# Altium PCB MyPCB.PcbDoc
Units mil, origin at the board's own origin, x right, y up, seen from the top; angles counter-clockwise.
Board outline 3937.01 x 3937.01 mil, 4 copper layers (Top Layer, GND, POWER, Bottom Layer), stack 13.956 mil thick; 65 components, 101 nets, 468 pads, 156 vias.
Unrouted connection lines stored in the file: 10.
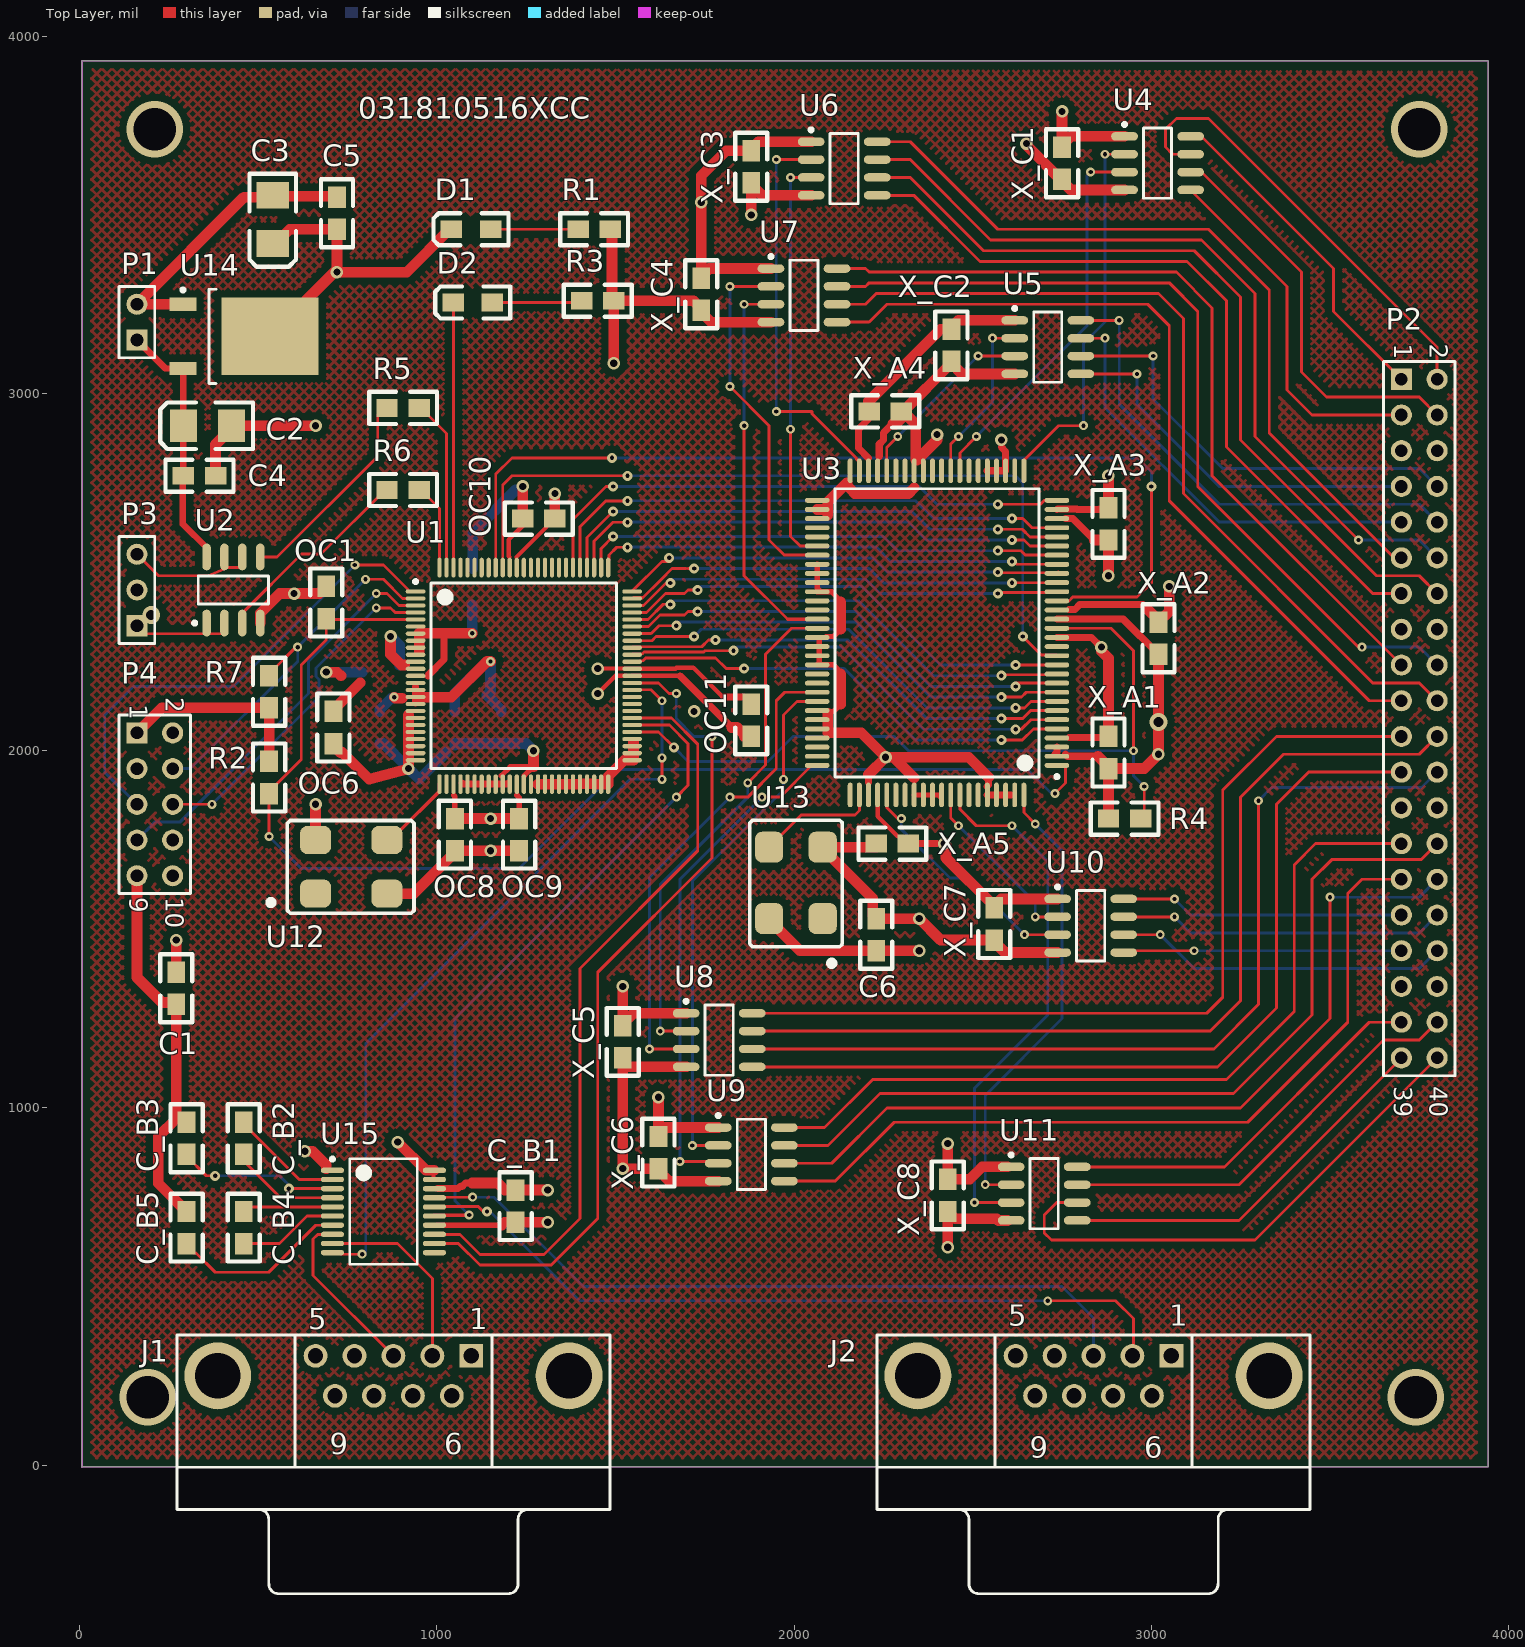
[diagram p0: Top Layer view]
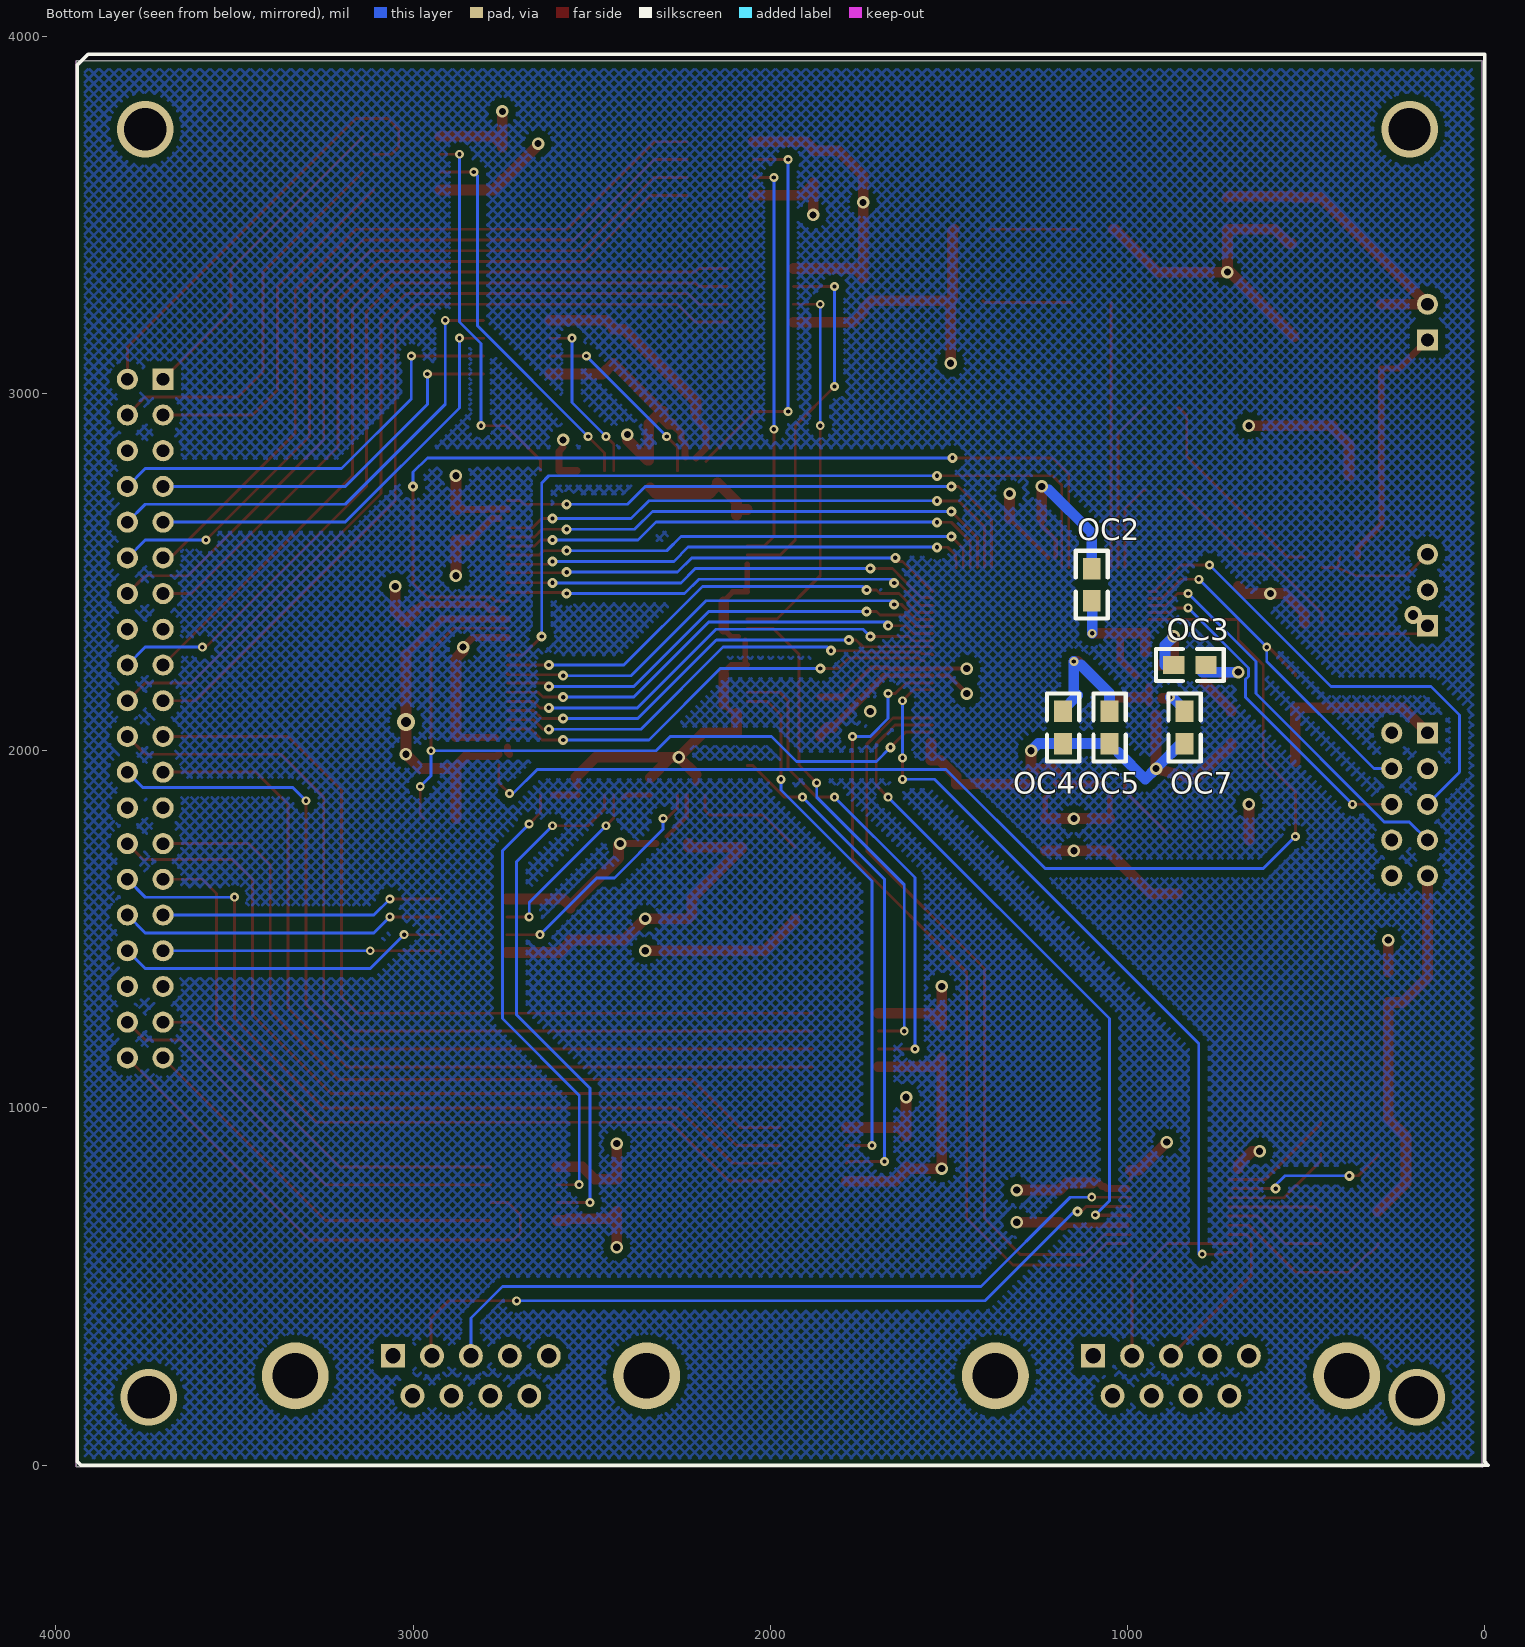
[diagram p1: Bottom Layer view, seen from below]
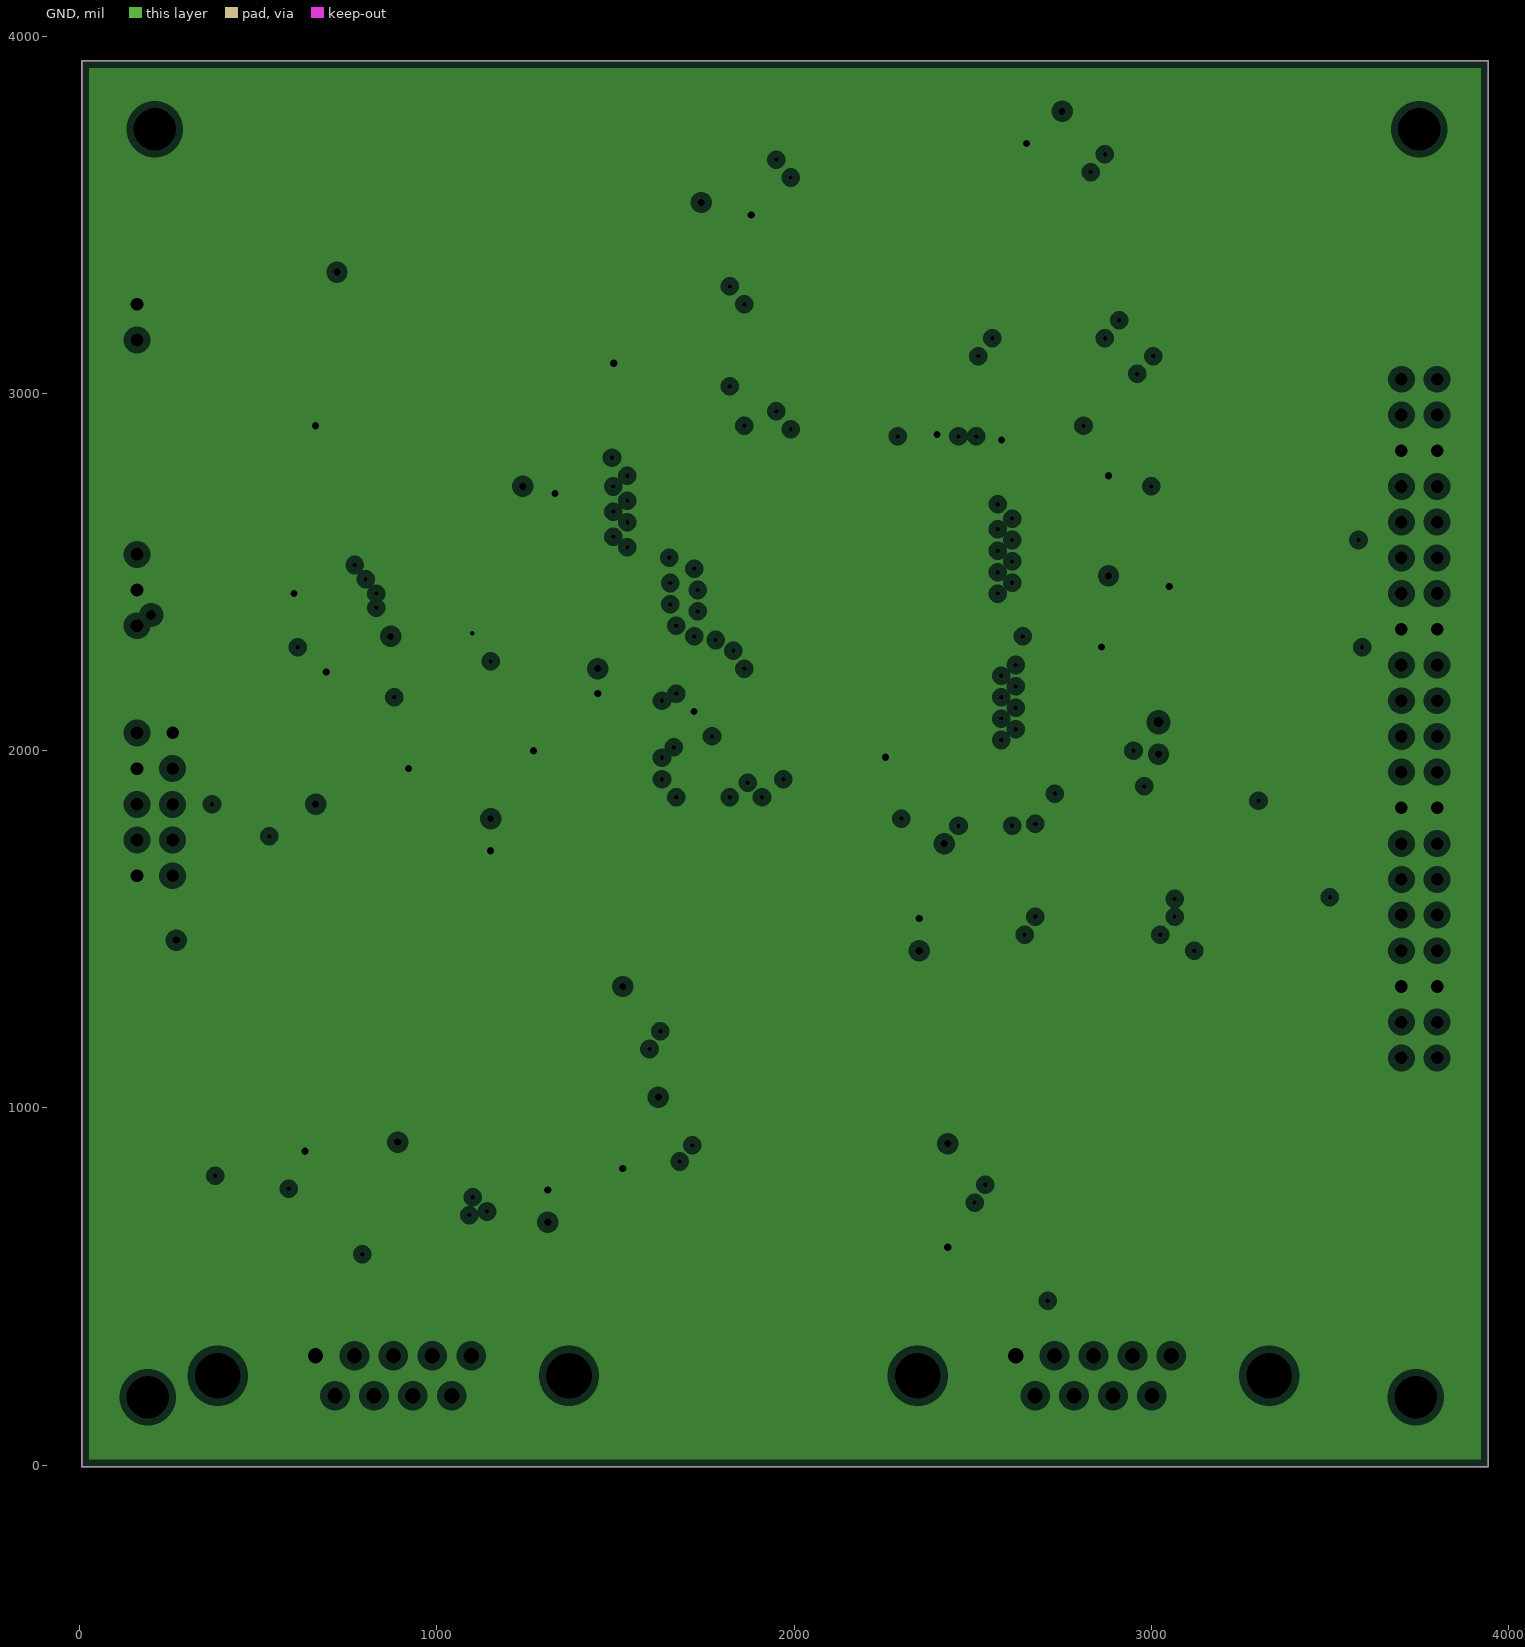
[diagram p2: GND, clearances drawn from the general rule]
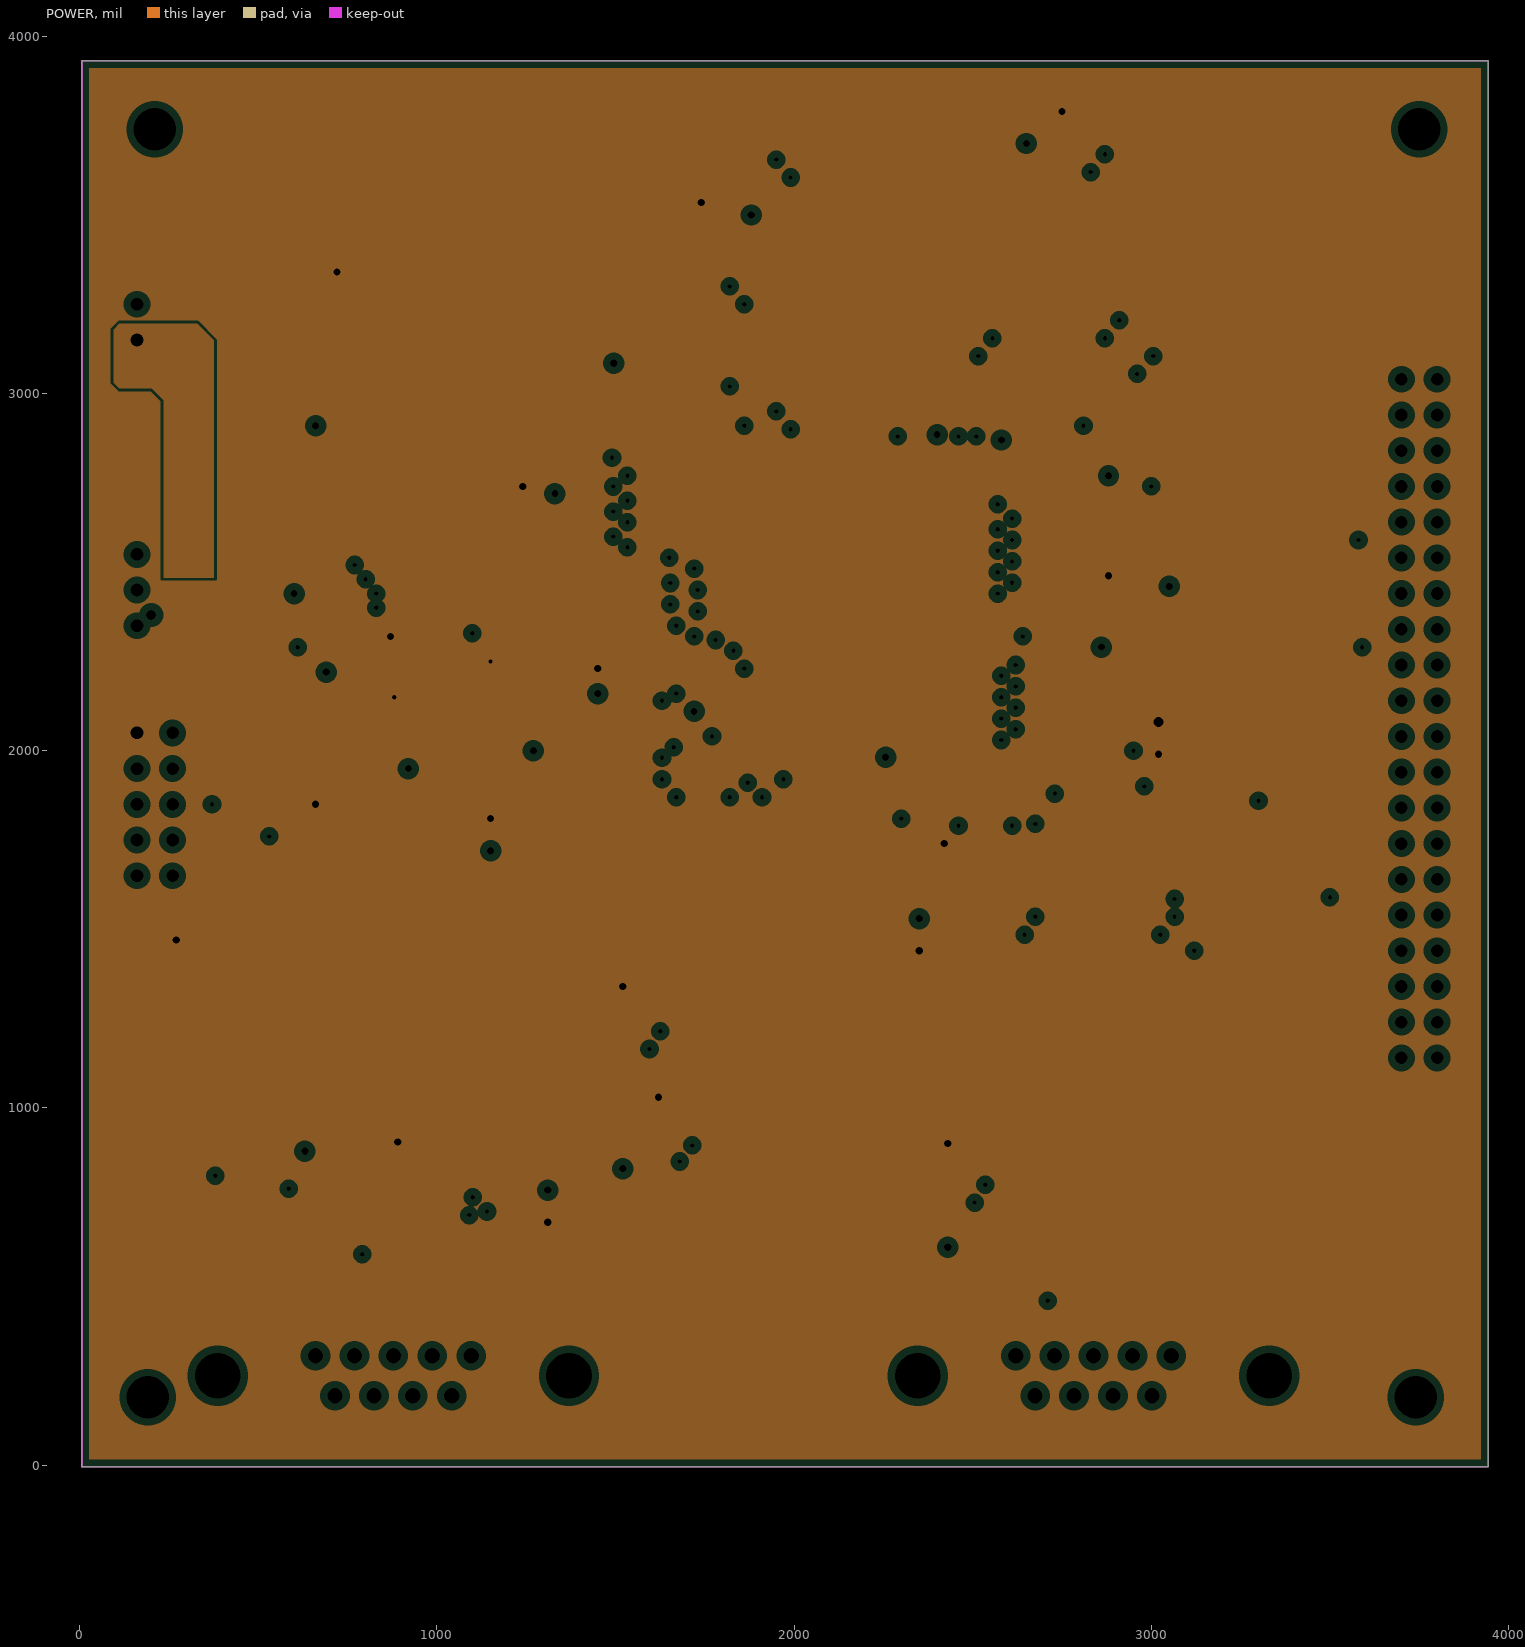
[diagram p3: POWER, clearances drawn from the general rule]

## Layer stack, top to bottom
Top Solder: solder mask 0.4, Solder Resist, Dk 3.5
Top Layer: signal copper 1.4
Dielectric 2: prepreg 2.8, PP-006, Dk 4.1
GND: plane copper 1.3778, net GND
Dielectric 1: prepreg 2.8, PP-006, Dk 4.1
POWER: plane copper 1.3778, net (Multiple Nets)
Dielectric 3: prepreg 2.8, PP-006, Dk 4.1
Bottom Layer: signal copper 1.4
Bottom Solder: solder mask 0.4, Solder Resist, Dk 3.5

## Board outline
6.1,-5 6.1,3932.01 3943.11,3932.01 3943.11,-5

## Design rules (kind name [scope] priority, off if disabled: settings)
Clearance Clearance_1 [All] p1: gap=7 ignorepadtopadclearanceinfootprint=FALSE except(20: Arc-Poly Track-Poly SMDPad-Poly THPad-Poly Via-Poly Fill-Poly Poly-Poly)
HoleSize [All] p1: absolutevalues=TRUE maxlimit=150 minlimit=8 maxpercent=80.000 minpercent=20.000
MinimumSolderMaskSliver [All] p1 off: minsoldermaskwidth=10
PlaneClearance [All] p1: clearance=20
PlaneConnect [All] p1: planeconnectstyle=Relief reliefexpansion=20 reliefentries=4 reliefconductorwidth=10 reliefairgap=10
PolygonConnect [All] p1: connectstyle=Relief reliefconductorwidth=10 reliefentries=4 polygonreliefangle="90 Angle" airgapwidth=10
RoutingVias [All] p1: holewidth=12 width=25 viastyle="Through Hole" minholewidth=8 minwidth=20 maxholewidth=28 maxwidth=50
SilkToSilkClearance [All] p1 off: silktosilkclearance=10
SolderMaskExpansion [All] p1: expansion=4
Width [All] p1: maxlimit=50 minlimit=8 preferedwidth=10
25 further rules are at their usual default settings.

## Components (designator, comment, footprint, x,y, rotation, side; value= is the part's Value field where it differs from the comment)
C1 "Cap 0.1uf" 0805 270,1380 r270 top value=0.1uF
C2 "Cap Pol 4.7uf" 3528 290,2910 r180 top value=4.7uF
C3 "Cap Pol 4.7uf" 3528 540,3420 r270 top value=4.7uF
C4 "Cap 0.1uf" 0805 380,2770 r180 top value=0.1uF
C5 "Cap 0.1uf" 0805 720,3550 r270 top value=0.1uF
C6 "Cap 0.1uf" 0805 2230,1440 r90 top value=0.1uF
C_B1 "Cap 0.1uf" 0805 1220,680 r90 top value=0.1uF
C_B2 "Cap 0.1uf" 0805 459,870 r90 top value=0.1uF
C_B3 "Cap 0.1uf" 0805 299,870 r90 top value=0.1uF
C_B4 "Cap 0.1uf" 0805 459,620 r90 top value=0.1uF
C_B5 "Cap 0.1uf" 0805 299,620 r90 top value=0.1uF
D1 "LED1" 3216 1040,3460 r180 top
D2 "LED1" 3216 1045,3255 r180 top
J1 "RS232" DSUB1.385-2H9 878.07,-124.02 r180 top
J2 "RS232" DSUB1.385-2H9 2838.07,-124.02 r180 top
OC1 "Cap 0.1uf" 0805 690,2460 r270 top value=0.1uF
OC2 "Cap 0.1uf" 0805 1100,2510 r270 bottom value=0.1uF
OC3 "Cap 0.1uf" 0805 870,2240 r180 bottom value=0.1uF
OC4 "Cap 0.1uf" 0805 1180,2020 r90 bottom value=0.1uF
OC5 "Cap 0.1uf" 0805 1050,2020 r90 bottom value=0.1uF
OC6 "Cap 0.1uf" 0805 710,2020 r90 top value=0.1uF
OC7 "Cap 0.1uf" 0805 840,2020 r90 bottom value=0.1uF
OC8 "Cap 0.1uf" 0805 1050,1810 r270 top value=0.1uF
OC9 "Cap 0.1uf" 0805 1230,1810 r270 top value=0.1uF
OC10 "Cap 0.1uf" 0805 1330,2650 r180 top value=0.1uF
OC11 "Cap 0.1uf" 0805 1880,2040 r90 top value=0.1uF
P1 "Power" HDR1X2 160,3150 r90 top
P2 "Header 20X2" HDR2X20 3700,3040 r270 top
P3 "VOUT" HDR1X3 160,2350 r90 top
P4 "Header 5X2" HDR2X5 160,2050 r270 top
R1 "1k" 0805 1485,3460 r180 top value=1K
R2 "10k" 0805 530,1880 r90 top value=10K
R3 "1k" 0805 1495,3260 r180 top value=1K
R4 "51k" 0805 2970,1810 r180 top value=51K
R5 "10k" 0805 860,2960 r0 top value=10K
R6 "10k" 0805 860,2730 r0 top value=10K
R7 "10k" 0805 530,2210 r270 top value=10K
U1 "C8051F12x-13x" TSQFP50P1600X1600X120-100N 1243.15,2209.68 r0 top
U2 "ADA4625-2" SO-8_L 430,2450 r90 top
U3 "XR16L7881Q" QFP65P1800X2400X300-100N_30*20 2400,2330 r180 top
U4 "ADM488" SO-8_L 3017.48,3645 r0 top
U5 "ADM488" SO-8_L 2710,3130 r0 top
U6 "ADM488" SO-8_L 2140,3630 r0 top
U7 "ADM488" SO-8_L 2027.48,3275 r0 top
U8 "ADM488" SO-8_L 1790,1190 r0 top
U9 "ADM488" SO-8_L 1880,870 r0 top
U10 "ADM488" SO-8_L 2830,1510 r0 top
U11 "ADM488" SO-8_L 2700,760 r0 top
U12 "25MHz" my_SiT8103 660,1600 r0 top
U13 "22.1184MHz" my_SiT8103 2080,1530 r90 top
U14 "LM1117DT-3.3" TD03B_N 460,3160 r0 top
U15 "SP3223E" SOP65P800X200-20N 850,710 r0 top
X_A1 "Cap 0.1uf" 0805 2880,2040 r270 top value=0.1uF
X_A2 "Cap 0.1uf" 0805 3020,2360 r270 top value=0.1uF
X_A3 "Cap 0.1uf" 0805 2880,2680 r270 top value=0.1uF
X_A4 "Cap 0.1uf" 0805 2300,2950 r180 top value=0.1uF
X_A5 "Cap 0.1uf" 0805 2230,1740 r0 top value=0.1uF
X_C1 "Cap 0.1uf" 0805 2750,3600 r90 top value=0.1uF
X_C2 "Cap 0.1uf" 0805 2440,3090 r90 top value=0.1uF
X_C3 "Cap 0.1uf" 0805 1880,3590 r90 top value=0.1uF
X_C4 "Cap 0.1uf" 0805 1740,3233 r90 top value=0.1uF
X_C5 "Cap 0.1uf" 0805 1520,1140 r90 top value=0.1uF
X_C6 "Cap 0.1uf" 0805 1620,830 r90 top value=0.1uF
X_C7 "Cap 0.1uf" 0805 2560,1470 r90 top value=0.1uF
X_C8 "Cap 0.1uf" 0805 2430,710 r90 top value=0.1uF

## Footprints (in the part's own frame and the unit in brackets; to place one, negate y for a bottom-side part, rotate by r counter-clockwise, add the part's x,y. Pads: shape width x height; smd on the part's side, far side on the other; paste and mask are expansions set on the pad)
0805 [mil]
  rect 60x50 smd: 1(0,0) 2(90,0)
  silkscreen extent -50,-45 140,45
3216 [mil]
  rect 60x50 smd: 1(0,0) 2(-110,0)
  silkscreen extent -160,-45 50,45
3528 [mil]
  rect 75x90 smd: 1(0,0) 2(-135,0)
  silkscreen extent -195,-65 65,65
DSUB1.385-2H9 [mm] "Connector; D Subminiature; 9 Position; Right Angle; Pitch 1.385 mm"
  rect 1.69x1.69 hole 1.09: 1(-5.54,-10.92)
  round 1.69 hole 1.09: 2(-2.77,-10.92) 3(0,-10.92) 4(2.77,-10.92) 5(5.54,-10.92) 6(-4.155,-8.08) 7(-1.385,-8.08) 8(1.385,-8.08) 9(4.155,-8.08)
  round 4.76 hole 3.26: 10(-12.495,-9.5) 11(12.495,-9.5)
  silkscreen extent -15.4,-12.4 15.4,6
HDR1X2 [mm] "Connector; Header; 2 Position"
  rect 1.5x1.5 hole 0.9: 1(0,0)
  round 1.5 hole 0.9: 2(2.54,0)
  silkscreen extent -1.27,-1.27 3.81,1.27
HDR1X3 [mm] "Connector; Header; 3 Position"
  rect 1.5x1.5 hole 0.9: 1(0,0)
  round 1.5 hole 0.9: 2(2.54,0) 3(5.08,0)
  silkscreen extent -1.27,-1.27 6.35,1.27
HDR2X5 [mm] "Connector; Header; 5x2 Position"
  rect 1.5x1.5 hole 0.9: 1(0,0)
  round 1.5 hole 0.9: 2(0,2.54) 3(2.54,0) 4(2.54,2.54) 5(5.08,0) 6(5.08,2.54) 7(7.62,0) 8(7.62,2.54) 9(10.16,0) 10(10.16,2.54)
  silkscreen extent -1.27,-1.27 11.43,3.81
HDR2X20 [mm] "Connector; Header; 20x2 Position"
  rect 1.5x1.5 hole 0.9: 1(0,0)
  round 1.5 hole 0.9: 2(0,2.54) 3(2.54,0) 4(2.54,2.54) 5(5.08,0) 6(5.08,2.54) 7(7.62,0) 8(7.62,2.54) 9(10.16,0) 10(10.16,2.54) 11(12.7,0) 12(12.7,2.54) 13(15.24,0) 14(15.24,2.54) 15(17.78,0) 16(17.78,2.54) 17(20.32,0) 18(20.32,2.54) 19(22.86,0) 20(22.86,2.54) 21(25.4,0) 22(25.4,2.54) 23(27.94,0) 24(27.94,2.54) 25(30.48,0) 26(30.48,2.54) 27(33.02,0) 28(33.02,2.54) 29(35.56,0) 30(35.56,2.54) 31(38.1,0) 32(38.1,2.54) 33(40.64,0) 34(40.64,2.54) 35(43.18,0) 36(43.18,2.54) 37(45.72,0) 38(45.72,2.54) 39(48.26,0) 40(48.26,2.54)
  silkscreen extent -1.27,-1.27 49.53,3.81
my_SiT8103 [mm]
  rrect50% 2.2x2 smd: 1(0,0) 2(5.08,0) 3(5.08,3.81) 4(0,3.81)
  silkscreen extent -3.37,-1.4 7,5.2
QFP65P1800X2400X300-100N_30*20 [mm] "QFP, 100-Leads, Body 14.00x20.00mm, Pitch 0.65mm, IPC Medium Density"
  oval 1.75x0.35 smd: 1(-8.525,9.425) 2(-8.525,8.775) 3(-8.525,8.125) 4(-8.525,7.475) 5(-8.525,6.825) 6(-8.525,6.175) 7(-8.525,5.525) 8(-8.525,4.875) 9(-8.525,4.225) 10(-8.525,3.575) 11(-8.525,2.925) 12(-8.525,2.275) 13(-8.525,1.625) 14(-8.525,0.975) 15(-8.525,0.325) 16(-8.525,-0.325) 17(-8.525,-0.975) 18(-8.525,-1.625) 19(-8.525,-2.275) 20(-8.525,-2.925) 21(-8.525,-3.575) 22(-8.525,-4.225) 23(-8.525,-4.875) 24(-8.525,-5.525) 25(-8.525,-6.175) 26(-8.525,-6.825) 27(-8.525,-7.475) 28(-8.525,-8.125) 29(-8.525,-8.775) 30(-8.525,-9.425) 51(8.525,-9.425) 52(8.525,-8.775) 53(8.525,-8.125) 54(8.525,-7.475) 55(8.525,-6.825) 56(8.525,-6.175) 57(8.525,-5.525) 58(8.525,-4.875) 59(8.525,-4.225) 60(8.525,-3.575) 61(8.525,-2.925) 62(8.525,-2.275) 63(8.525,-1.625) 64(8.525,-0.975) 65(8.525,-0.325) 66(8.525,0.325) 67(8.525,0.975) 68(8.525,1.625) 69(8.525,2.275) 70(8.525,2.925) 71(8.525,3.575) 72(8.525,4.225) 73(8.525,4.875) 74(8.525,5.525) 75(8.525,6.175) 76(8.525,6.825) 77(8.525,7.475) 78(8.525,8.125) 79(8.525,8.775) 80(8.525,9.425)
  oval 0.35x1.75 smd: 31(-6.175,-11.525) 32(-5.525,-11.525) 33(-4.875,-11.525) 34(-4.225,-11.525) 35(-3.575,-11.525) 36(-2.925,-11.525) 37(-2.275,-11.525) 38(-1.625,-11.525) 39(-0.975,-11.525) 40(-0.325,-11.525) 41(0.325,-11.525) 42(0.975,-11.525) 43(1.625,-11.525) 44(2.275,-11.525) 45(2.925,-11.525) 46(3.575,-11.525) 47(4.225,-11.525) 48(4.875,-11.525) 49(5.525,-11.525) 50(6.175,-11.525) 81(6.175,11.525) 82(5.525,11.525) 83(4.875,11.525) 84(4.225,11.525) 85(3.575,11.525) 86(2.925,11.525) 87(2.275,11.525) 88(1.625,11.525) 89(0.975,11.525) 90(0.325,11.525) 91(-0.325,11.525) 92(-0.975,11.525) 93(-1.625,11.525) 94(-2.275,11.525) 95(-2.925,11.525) 96(-3.575,11.525) 97(-4.225,11.525) 98(-4.875,11.525) 99(-5.525,11.525) 100(-6.175,11.525)
  silkscreen extent -8.65,-10.25 7.25,10.35, body extent -7,-10 7,10, height 3
SO-8_L [mm] "SOIC, 8-Leads, Body 4.9x3.9mm, Pitch 1.27mm, IPC High Density"
  oval 1.9x0.6 smd: 1(-2.35,1.905) 2(-2.35,0.635) 3(-2.35,-0.635) 4(-2.35,-1.905) 5(2.35,-1.905) 6(2.35,-0.635) 7(2.35,0.635) 8(2.35,1.905)
  silkscreen extent -2.47,-2.5 1,2.88, body extent -1.95,-2.45 1.95,2.45, height 1.75
SOP65P800X200-20N [mm] "SOP, 20-Leads, Body 7.35x5.45mm, Pitch 0.65mm, IPC Medium Density"
  oval 1.65x0.38 smd: 1(-3.625,2.925) 2(-3.625,2.275) 3(-3.625,1.625) 4(-3.625,0.975) 5(-3.625,0.325) 6(-3.625,-0.325) 7(-3.625,-0.975) 8(-3.625,-1.625) 9(-3.625,-2.275) 10(-3.625,-2.925) 11(3.625,-2.925) 12(3.625,-2.275) 13(3.625,-1.625) 14(3.625,-0.975) 15(3.625,-0.325) 16(3.625,0.325) 17(3.625,0.975) 18(3.625,1.625) 19(3.625,2.275) 20(3.625,2.925)
  silkscreen extent -3.75,-3.75 2.4,3.85, body extent -2.8,-3.75 2.8,3.75, height 2
TD03B_N [mm] "D-PAK, 4-Leads, Body 6.1x6.6mm, Pitch 2.29mm, Lead Span 9.7mm, IPC Medium Density"
  rect 1.9x0.95 smd: 1(-4.35,2.28) 3(-4.35,-2.28)
  rect 6.9x5.5 smd: 4(1.85,0)
  silkscreen extent -4.47,-3.35 -2,3.43, body extent -2.5,-3.35 3.7,3.35, height 2.38
TSQFP50P1600X1600X120-100N [mm] "TSQFP, 100-Leads, Body 14.00x14.00mm, Pitch 0.50mm, IPC Medium Density"
  oval 1.4x0.3 smd: 1(-7.7,6) 2(-7.7,5.5) 3(-7.7,5) 4(-7.7,4.5) 5(-7.7,4) 6(-7.7,3.5) 7(-7.7,3) 8(-7.7,2.5) 9(-7.7,2) 10(-7.7,1.5) 11(-7.7,1) 12(-7.7,0.5) 13(-7.7,0) 14(-7.7,-0.5) 15(-7.7,-1) 16(-7.7,-1.5) 17(-7.7,-2) 18(-7.7,-2.5) 19(-7.7,-3) 20(-7.7,-3.5) 21(-7.7,-4) 22(-7.7,-4.5) 23(-7.7,-5) 24(-7.7,-5.5) 25(-7.7,-6) 51(7.7,-6) 52(7.7,-5.5) 53(7.7,-5) 54(7.7,-4.5) 55(7.7,-4) 56(7.7,-3.5) 57(7.7,-3) 58(7.7,-2.5) 59(7.7,-2) 60(7.7,-1.5) 61(7.7,-1) 62(7.7,-0.5) 63(7.7,0) 64(7.7,0.5) 65(7.7,1) 66(7.7,1.5) 67(7.7,2) 68(7.7,2.5) 69(7.7,3) 70(7.7,3.5) 71(7.7,4) 72(7.7,4.5) 73(7.7,5) 74(7.7,5.5) 75(7.7,6)
  oval 0.3x1.4 smd: 26(-6,-7.7) 27(-5.5,-7.7) 28(-5,-7.7) 29(-4.5,-7.7) 30(-4,-7.7) 31(-3.5,-7.7) 32(-3,-7.7) 33(-2.5,-7.7) 34(-2,-7.7) 35(-1.5,-7.7) 36(-1,-7.7) 37(-0.5,-7.7) 38(0,-7.7) 39(0.5,-7.7) 40(1,-7.7) 41(1.5,-7.7) 42(2,-7.7) 43(2.5,-7.7) 44(3,-7.7) 45(3.5,-7.7) 46(4,-7.7) 47(4.5,-7.7) 48(5,-7.7) 49(5.5,-7.7) 50(6,-7.7) 76(6,7.7) 77(5.5,7.7) 78(5,7.7) 79(4.5,7.7) 80(4,7.7) 81(3.5,7.7) 82(3,7.7) 83(2.5,7.7) 84(2,7.7) 85(1.5,7.7) 86(1,7.7) 87(0.5,7.7) 88(0,7.7) 89(-0.5,7.7) 90(-1,7.7) 91(-1.5,7.7) 92(-2,7.7) 93(-2.5,7.7) 94(-3,7.7) 95(-3.5,7.7) 96(-4,7.7) 97(-4.5,7.7) 98(-5,7.7) 99(-5.5,7.7) 100(-6,7.7)
  silkscreen extent -7.82,-6.6 6.6,6.82, body extent -7,-7 7,7, height 1.2

## Part data
C1 C4 C5 C6 C_B1 C_B2 C_B3 C_B4 C_B5 OC1 OC2 OC3 OC4 OC5 OC6 OC7 OC8 OC9 OC10 OC11 X_A1 X_A2 X_A3 X_A4 X_A5 X_C1 X_C2 X_C3 X_C4 X_C5 X_C6 X_C7 X_C8: library part Cap, "Capacitor", LatestRevisionDate=17-Jul-2002, LatestRevisionNote="Re-released for DXP Platform.", PackageDescription="Radial Cap, Thru-Hole; 2 Leads; 0.3 in Pin Spacing", PackageReference=RAD-0.3, Published=8-Jun-2000, Publisher="Altium Limited"
C2 C3: library part "Cap Pol3", "Polarized Capacitor (Surface Mount)", LatestRevisionDate=29-May-2009, LatestRevisionNote="IPC-7351 Footprint Added.", PackageDescription="Chip Capacitor", PackageReference=C0805, Published=8-Jun-2000, Publisher="Altium Limited"
D1 D2: "Typical RED GaAs LED", LatestRevisionDate=08-Jul-2005, LatestRevisionNote="Mech Layer 1 removed.", PackageDescription="LED; 2 Leads", PackageReference=LED-1, Published=8-Jun-2000, Publisher="Altium Limited"
J1 J2: library part "D Connector 9", "Receptacle Assembly, 9 Position, Right Angle", PackageDocument=O, DatasheetDocument=1-Sep-1999, Gender=Receptacle, LatestRevisionDate=17-Jul-2002, LatestRevisionNote="Re-released for DXP Platform.", Orientation="Right Angle", PackageReference=788750, Positions=9, Published=15-Jun-2001, Publisher="Altium Limited"
P1: library part "Header 2", "Header, 2-Pin", LatestRevisionDate=17-Jul-2002, LatestRevisionNote="Re-released for DXP Platform.", Publisher="Altium Limited"
P2: "Header, 20-Pin, Dual row", LatestRevisionDate=17-Jul-2002, LatestRevisionNote="Re-released for DXP Platform.", Publisher="Altium Limited"
P3: library part "Header 3", "Header, 3-Pin", LatestRevisionDate=17-Jul-2002, LatestRevisionNote="Re-released for DXP Platform.", Publisher="Altium Limited"
P4: "Header, 5-Pin, Dual row", LatestRevisionDate=17-Jul-2002, LatestRevisionNote="Re-released for DXP Platform.", Publisher="Altium Limited"
R1 R2 R3 R4 R5 R6 R7: library part Res1, "Resistor", LatestRevisionDate=17-Jul-2002, LatestRevisionNote="Re-released for DXP Platform.", PackageDescription="Axial Device, Thru-Hole; 2 Leads; 0.3 in Pin Spacing", PackageReference=AXIAL-0.3, Published=8-Jun-2000, Publisher="Altium Limited"
U1: library part COMPONENT_1
U2: library part OP297GS, "Dual Low-Bias-Current Precision Operational Amplifier", Code_IPC=SOIC127P600-8, Code_JEDEC=MS-012-AA, ComponentLink1Description="Manufacturer Link", ComponentLink1URL=http://www.analog.com/en/prod/0,,759_786_OP297%2C00.html, ComponentLink2Description=Datasheet, ComponentLink2URL=http://www.analog.com/UploadedFiles/Data_Sheets/36971711685OP297_e_.pdf, ComponentLink3Description="Discontinuation Notice", ComponentLink3URL=http://www.analog.com/UploadedFiles/Aerospace_Information/505817548385948813507767505obsolete.pdf, DatasheetVersion="REV. D 1997", LatestRevisionDate=13-Apr-2006, LatestRevisionNote="IPC-7351 Footprint Added.", PackageDescription="8-Pin Small Outline Integrated Circuit 1.27 mm Pitch", PackageReference=SO-8, PackageVersion=revA, Published=8-Jun-2000, Publisher="Altium Limited"
U3: library part my_XR16L7881Q
U4 U5 U6 U7 U8 U9 U10 U11: library part my_ADM488
U12 U13: library part my_SiT8103
U14: "800mA Low-Dropout Linear Regulator, 3-pin TO-252", Manufacturer="National Semiconductor", PackageTopMarking=NSUZXYTT*LM1117*DT-3.3, PowerWise=N, Supplier Part Number 1=9486275, Code_JEDEC=TO-252-AA, ComponentLink1Description="LM1117 Datasheet", ComponentLink1URL=http://www.national.com/ds/LM/LM1117.pdf, ComponentLink2Description="LM1117 Web Page", ComponentLink2URL=http://www.national.com/pf/LM/LM1117.html, ComponentLink3Description="TD03B Package Page", ComponentLink3URL=http://www.national.com/packaging/folders/td03b.html, CompType="LDO IC", DatasheetVersion=Apr-2006, PackageDescription="TO252, Molded, Jedec, 6.8 x 6.10 x 2.30mm Body, 3 Lead, 2.28mm Pitch, Surface Mount", PackageReference=TD03B, PackageVersion="revD, Feb-2009", PartNumber=LM1117DT-3.3, PinCount=3, Published=4-Dec-2008, Publisher="Altium Limited", RoHS=N, Supplier 1=Farnell, Supplier 2=Farnell, Supplier Part Number 2=1523829
U15: library part my_SP3223E

## Via types
v1: diameter 25, hole 12, Top Layer to Bottom Layer, 67 vias
v2: diameter 28, hole 12, Top Layer to Bottom Layer, 42 vias
v3: diameter 35, hole 20, Top Layer to Bottom Layer, 41 vias
v4: diameter 157.48, hole 118.11, Top Layer to Bottom Layer, 4 vias
v5: diameter 50, hole 28, Top Layer to Bottom Layer, 2 vias

## Nets (pads, with @x,y where several pads share a name; then routed paths per layer and width w, separated by ;. In a path a pad name is that pad's centre, name@x,y a point inside that pad or via, vN(x,y) a via of type N, cw(c..) or ccw(c..) an arc to the next point about the centre after c; other vN are vias at no path point)
+3.3V: C1.1 C3.1 C5.2 C6.1 C_B1.1 D1.1 OC2.1 OC3.1 OC4.2 OC5.2 OC6.2 OC7.2 OC8.1 OC9.1 OC10.2 OC11.2 P4.1 R2.2 R4.2 R7.2 U1.11 U1.12 U1.14 U1.15 U1.16 U1.17 U1.28 U1.37 U1.64 U1.90 U3.2 U3.3 U3.17 U3.28 U3.48 U3.84 U4.1 U5.1 U6.1 U7.1 U8.1 U9.1 U10.1 U11.1 U12.4 U13.4 U14.4 U15.14 U15.19 U15.20 X_A1.2 X_A2.2 X_A3.2 X_A4.2 X_A5.2 X_C1.2 X_C2.2 X_C3.2 X_C4.2 X_C5.2 X_C6.2 X_C7.2 X_C8.2 | length 9491.1
  Top Layer w12: U15.20@990,820 990,802.28 U15.19 ; U1.90@1203,2540 1203,2542.32 1201.09,2544.22 1201.09,2591.09 1240,2630 OC10.2 ; v3(1450,2230) U1.64@1545.67,2230 ; U1.64 1667.48,2229.37 1670.79,2232.68 1717.32,2232.68 1800,2150 ; U3.84 2233.66,1816.34 X_A5.2@2290,1760
  Top Layer w15: U15.14@1001.72,671.61 1181.61,671.61 ; 1046.3,1875.71 1050,1872.01 OC8.1 ; 1223.47,1875.71 1230,1869.17 OC9.1
  Top Layer w20: U1.17@940,2134.16 U1.16 U1.15 940,2180.31 ; 1802.63,2150 OC11.2@1860,2150 ; 2207.56,2820 2180,2847.56 2180,2900 2209.77,2929.77 2209.77,2949.77 X_A4.2 ; X_A5.2 2400,1740 ; U3.2@2730,1990 2735.63,1995.63 U3.3 ; U3.17 2921.61,2368.39 X_A2.2 ; U3.2@2760,1990 2765.47,1984.53 2850.47,1984.53 ; U3.28@2760,2650 2780,2650 2840,2590
  Top Layer w30: P4.1 230,2120 R7.2 R2.2 ; C1.1 v3(270,1470) ; U14.4 720,3347.17 C5.2 587.5,3460 547.5,3420 C3.1 ; U12.4 v3(660,1850) ; OC6.2 710,2115 785,2190 ; v3(720,3340) 915,3340 1035,3460 D1.1 ; v3(870,2320) 870,2270 900,2240 910,2240 ; v1(880,2150) 882.87,2147.13 902.16,2147.13 ; v3(890,904.24) 969.08,825.16 U15.20@991.72,825.16 ; U1.16@950,2150 1040,2150 1140,2250 v1(1150,2250) ; OC8.1 v3(1150,1810) OC9.1 ; 1181.61,671.61 1190,680 v3(1310,680) ; OC10.2 v3(1240,2740) ; X_C5.2 X_C5.2@1520,1235 ; v3(1520,1340) X_C5.2@1520,1235 ; X_C6.2 X_C6.2@1620,925 ; v3(1620,1030) X_C6.2@1620,925 ; U8.1 1550,1265 X_C5.2@1520,1235 ; X_C4.2 X_C4.2@1740,3328 ; U9.1 1640,945 X_C6.2@1620,925 ; U13.4 1930,1526.06 2016.06,1440 C6.1 v3(2350,1440) ; U7.1 1762,3350 X_C4.2@1740,3328 ; U6.1 1900,3705 1880,3685 X_C3.2 1810,3680 1740,3610 v3(1740,3535) X_C4.2@1740,3328 ; X_A4.2@2209.77,2949.77 2208.07,2948.07 2208.07,2978.07 2410,3180 X_C2.2 2440,3185 2460,3205 U5.1 ; v3(2420,1740) 2425,1735 2425,1700 X_C7.2@2560,1565 ; v3(2430,900) X_C8.2 2491.6,800 2526.6,835 U11.1@2597.48,835 ; X_C7.2 X_C7.2@2560,1565 ; U10.1 2580,1585 X_C7.2@2560,1565 ; X_C1.2 X_C1.2@2750,3695 ; v3(2750,3790) X_C1.2@2750,3695 ; 2840,2590 X_A3.2 v3(2880,2490) ; 2850.47,1984.53 2880,1955 X_A1.2 ; R4.2 X_A1.2 ; U4.1 2775,3720 X_C1.2@2750,3695 ; X_A2.2 v3(3020,1990) 2980,1950 X_A1.2
  Bottom Layer w30: OC7.2 840,2115 872.13,2147.13 877.13,2147.13 v1(880,2150) ; v3(870,2320) 895,2295 OC3.1@895,2240 ; OC5.2 1050,2160 1130,2240 ; OC2.1 1100,2610 1220,2730 ; v1(1150,2250) 1150,2165 1140,2155 1180,2115 OC4.2
  other v5: 3020,2080
+5V: C2.1 C4.2 P1.1 U2.8 U14.3 | length 717.7
  Top Layer w18: P1.1 239.76,3070.24 U14.3 290,3068.98 C2.1 C4.2 ; C4.2@288.74,2770.24 288.74,2634.37 355,2568.11 U2.8
/INT_UART0: R4.1 U1.55 U3.16 | length 2210.3
  Top Layer w8: U1.55 1620.63,2052.2 v2(1663.15,2009.68) ; U3.16 2887.2,2342.8 2950,2280 v1(2950,2000) ; R4.1 2980,1820 v1(2980,1900)
  Bottom Layer w8: v2(1663.15,2009.68) 1702.83,1970 1926.7,1970 1996.7,2040 2280,2040 2320,2000 v1(2950,2000) 2950,1930 v1(2980,1900)
/RD: U1.92 U3.19 | length 2731.5
  Top Layer w8: U1.92 1164.41,2774.41 1210,2820 v2(1490,2820) ; U3.19@2738.2,2417 U3.19 2769.57,2419.57 2780,2430 2960,2430 3000,2470 v2(3000,2740)
  Bottom Layer w8: v2(1490,2820) 1680,2820 2960,2820 3000,2780 v2(3000,2740)
/RST: OC1.2 R2.1 U1.5 U3.1 | length 3399.9
  Top Layer w8: v1(530,1760) R2.1 530,1885 620,1975 620,2240 690,2310 OC1.2@690,2365 ; OC1.2 OC1.2@690,2365 ; U1.5 692.16,2367.16 OC1.2@690,2365 ; v1(2730,1880) 2760,1910 U3.1@2760,1960
  Bottom Layer w8: v1(530,1760) 620,1670 1230,1670 1507.59,1947.59 2652.4,1947.59 2720,1880 v1(2730,1880)
/UART_CS0: U1.81 U3.30 | length 1556.5
  Top Layer w8: U1.81 1380.95,2647.48 1473.15,2739.68 v2(1493.15,2739.68) ; v2(2570,2690) 2690,2690 2701.06,2701.06 2734.22,2701.06 2734.93,2701.77 U3.30
  Bottom Layer w8: v2@1490,2740 2350,2740 2400,2690 v2(2570,2690)
/WR: U1.91 U3.13 | length 2257.2
  Top Layer w8: U1.91 1184.09,2744.09 1209.68,2769.68 v2(1533.15,2769.68) ; v2(2640,2320) 2691.99,2268.01 2733.64,2268.01 U3.13
  Bottom Layer w8: v2@1530,2770 2620,2770 2640,2750 v2(2640,2320)
A0: U1.80 U3.27 | length 1513.9
  Top Layer w8: U1.80 1400.63,2627.16 1473.15,2699.68 v2(1533.15,2699.68) ; v2(2610,2650) 2640,2650 2665.71,2624.29 U3.27
  Bottom Layer w8: v2@1530,2700 2340,2700 2390,2650 v2(2610,2650)
A1: U1.79 U3.26 | length 1462.2
  Top Layer w8: U1.79 1420.32,2596.85 v2(1493.15,2669.68) ; v2(2570,2620) 2638.7,2620 2660,2598.7 U3.26
  Bottom Layer w8: v2@1490,2670 2330,2670 2380,2620 v2(2570,2620)
A2: U1.78 U3.25 | length 1422.2
  Top Layer w8: U1.78 1440,2586.53 1493.15,2639.68 v2(1533.15,2639.68) ; v2(2610,2590) 2643.11,2590 2660,2573.11 U3.25
  Bottom Layer w8: v2@1530,2640 2320,2640 2370,2590 v2(2610,2590)
A3: U1.77 U3.24 | length 1368.1
  Top Layer w8: U1.77 1459.69,2566.22 v2(1493.15,2599.68) ; v2(2570,2560) 2635.4,2560 2647.88,2547.52 U3.24
  Bottom Layer w8: v2@1490,2600 2250,2600 2290,2560 v2(2570,2560)
A4: U1.76 U3.23 | length 1323.8
  Top Layer w8: U1.76 1479.37,2532.05 1481.13,2533.81 1481.13,2547.66 1503.15,2569.68 v2(1533.15,2569.68) ; v2(2610,2530) 2615.41,2530 2623.48,2521.93 U3.23 U3.23@2736.7,2523
  Bottom Layer w8: v2@1530,2570 2230,2570 2270,2530 v2(2610,2530)
A5: U1.75 U3.22 | length 1265.8
  Top Layer w8: U1.75 1546.3,2446.3 1630,2530 1652.83,2530 1650,2532.83 v2(1650,2540) ; v2(2570,2500) 2571.83,2498.17 2733.8,2498.17 U3.22 U3.22@2739.29,2500
  Bottom Layer w8: v2@1650,2530 1660,2540 2220,2540 2260,2500 v2(2570,2500)
A6: U1.74 U3.21 | length 1237.3
  Top Layer w8: U1.74 1549.08,2429 1573.44,2429 1575.28,2427.16 1628.15,2480.04 1658.11,2510 1697.17,2510 ; 1702.83,2510 v2(1720,2510) ; v2(2610,2470) 2610.37,2470.37 2735.26,2470.37 U3.21 U3.21@2736,2470.37
  Bottom Layer w8: v2(1720,2510) 2210,2510 2250,2470 v2(2610,2470)
A7: U1.73 U3.20 | length 1244.9
  Top Layer w8: U1.73 1577.75,2406.53 1641.21,2470 1652.83,2470 v2(1653.15,2469.68) ; v2(2570,2440) 2572.92,2442.92 2733.39,2442.92 U3.20 U3.20@2737.87,2442.92
  Bottom Layer w8: v2@1650,2470 1660,2480 2200,2480 2240,2440 v2(2570,2440)
AD0: U1.72 U3.12 | length 1306.8
  Top Layer w8: U1.72 1586.85,2386.85 1640,2440 1692.83,2440 1702.83,2450 v2(1730,2450) ; v2(2620,2240) 2620.22,2240.22 2735.41,2240.22 U3.12
  Bottom Layer w8: v2@1720,2450 v2(1730,2450) ; 1740,2460 2190,2460 2410,2240 v2(2620,2240)
AD1: U1.71 U3.11 | length 1306.6
  Top Layer w8: U1.71 1590.63,2367.16 1633.47,2410 1652.83,2410 v2(1653.15,2409.68) ; v2(2580,2210) 2582.61,2212.61 2733.39,2212.61 U3.11@2737.87,2217.08
  Bottom Layer w8: v2@1650,2410 1660,2420 2180,2420 2390,2210 v2(2580,2210)
AD2: U1.70 U3.10 | length 1303.2
  Top Layer w8: U1.70 1592.16,2347.48 1624.68,2380 1692.83,2380 1702.83,2390 v2(1730,2390) ; v2(2620,2180) 2620,2189.25 U3.10
  Bottom Layer w8: v2(1730,2390) 2172.3,2390 2382.3,2180 v2(2620,2180)
AD3: U1.69 U3.9 | length 1291.2
  Top Layer w8: U1.69 1599.64,2327.79 1621.85,2350 v2(1670,2350) ; v2(2580,2150) 2636.34,2150 2650,2163.66 U3.9
  Bottom Layer w8: v2@1670,2360 2172.3,2360 2382.3,2150 v2(2580,2150)
AD4: U1.68 U3.8 | length 1287
  Top Layer w8: U1.68 1601.58,2308.11 1613.47,2320 v2(1720,2320) ; v2(2620,2120) 2644.72,2120 2662.79,2138.07 U3.8
  Bottom Layer w8: 1730,2330 1740,2340 2152.3,2340 2372.3,2120 v2(2620,2120)
AD5: U1.67 U3.7 | length 1298.7
  Top Layer w8: U1.67 1549.08,2291.2 1741.2,2291.2 1760,2310 v2(1780,2310) ; v2(2580,2090) 2640,2090 2662.48,2112.48 U3.7
  Bottom Layer w8: v2(1780,2310) 2151.04,2310 2371.04,2090 v2(2580,2090)
AD6: U1.66 U3.6 | length 1304.5
  Top Layer w8: U1.66 1549.08,2271.52 1574.96,2271.52 1579.64,2276.2 1747.42,2276.2 1751.21,2280 v2(1830,2280) ; v2(2620,2060) 2635.9,2060 2662.79,2086.89 U3.6
  Bottom Layer w8: v2(1830,2280) 1840,2290 2132.3,2290 2362.3,2060 v2(2620,2060)
AD7: U1.65 U3.5 | length 1277.2
  Top Layer w8: U1.65@1570,2251.83 1576.49,2251.83 1584.65,2260 1780,2260 1810,2230 v2(1860,2230) ; v2(2580,2030) 2638.7,2030 2670,2061.3 U3.5
  Bottom Layer w8: v2(1860,2230) 2140,2230 2340,2030 v2(2580,2030)
CLK_CPU: U1.26 U12.3 | length 185
  Top Layer w10: U12.3@890,1770 1006.93,1886.93 U1.26
CLK_UART: U3.82 U13.3 | length 340.7
  Top Layer w8: U13.3@1930,1731.97 U13.3 2020,1820 2170,1820 2182.48,1832.48 U3.82
CPU_RXD0: U1.61 U15.10 | length 2131.4
  Top Layer w8: U15.10@706.28,594.84 728.92,594.84 733.26,590.5 v1(790.5,590.5) ; U1.61@1543.15,2170.63 1599.37,2170.63 v1(1630,2140) ; v1(1630,1920) v1(1630,1980)
  Bottom Layer w8: v1@800.5,590.5 800.5,1180.5 1540,1920 v1(1630,1920) ; v1(1630,1980) v1(1630,2140)
CPU_RXD1: U1.56 U15.15 | length 1884.7
  Top Layer w8: U1.56 1650.95,2071.89 1703.15,2019.68 1703.15,1903.15 v1(1670,1870)
  Top Layer w10: U15.15@991.72,697.2 994.51,700 v1(1090,700)
  Bottom Layer w8: v1(1090,700) 1050,740 1050,1250 v1(1670,1870)
CPU_TXD0: U1.62 U15.12 | length 2336.5
  Top Layer w8: U15.12@1001.72,620.43 1059.57,620.43 1120,560 1320,560 1450,690 1450,1380 1770,1700 v1(1770,2040) ; U1.62 1620,2190 1650,2160 v1(1670,2160)
  Bottom Layer w8: v1(1670,2160) 1670,2090 1720,2040 v1(1770,2040)
CPU_TXD1: U1.57 U15.13 | length 2145.1
  Top Layer w8: U15.13@991.72,646.02 U15.13@993.95,643.79 ; U15.13@1001.72,646.02 1063.98,646.02 1120,590 1300,590 1400,690 1400,1390 1730,1720 1730,2018.32 1656.75,2091.57 U1.57
GND: C1.2 C2.2 C3.2 C4.1 C5.1 C6.2 C_B1.2 C_B3.2 C_B5.2 J1.5 J2.5 OC1.1 OC2.2 OC3.2 OC4.1 OC5.1 OC6.1 OC7.1 OC8.2 OC9.2 OC10.1 OC11.1 P1.2 P2.5 P2.6 P2.15 P2.16 P2.25 P2.26 P2.35 P2.36 P3.2 P4.2 P4.3 P4.9 R1.1 R3.1 U1.6 U1.7 U1.8 U1.9 U1.10 U1.13 U1.18 U1.19 U1.20 U1.21 U1.22 U1.23 U1.24 U1.25 U1.29 U1.30 U1.31 U1.32 U1.33 U1.34 U1.35 U1.36 U1.38 U1.39 U1.40 U1.41 U1.42 U1.43 U1.44 U1.45 U1.46 U1.47 U1.48 U1.49 U1.50 U1.51 U1.52 U1.53 U1.54 U1.58 U1.59 U1.60 U1.63 U1.89 U2.4 U3.4 U3.14 U3.15 U3.18 U3.29 U3.32 U3.33 U3.34 U3.35 U3.40 U3.41 U3.42 U3.43 U3.47 U3.50 U3.51 U3.52 U3.53 U3.58 U3.59 U3.60 U3.61 U3.66 U3.67 U3.68 U3.69 U3.74 U3.75 U3.76 U3.77 U3.83 U3.88 U3.89 U3.90 U3.91 U3.96 U3.97 U3.98 U3.99 U4.4 U5.4 U6.4 U7.4 U8.4 U9.4 U10.4 U11.4 U12.2 U13.2 U14.1 U15.1 U15.18 X_A1.1 X_A2.1 X_A3.1 X_A4.1 X_A5.1 X_C1.1 X_C2.1 X_C3.1 X_C4.1 X_C5.1 X_C6.1 X_C7.1 X_C8.1 | length 13602.2
  Top Layer w12: U1.89@1222.69,2540 1222.69,2542.69 OC10.1 ; v3(1450,2160) 1500,2210 U1.63@1530,2210 ; U1.63 1679.68,2209.68 1680,2210
  Top Layer w15: U1.35@1180,1930 1205.04,1955.04 1268.91,1955.04 ; U1.38@1243.87,1930 1268.91,1955.04 ; 1270,1955.04 1268.91,1955.04 ; U3.61 2104.84,2445.16 2130,2420 ; U3.58 U3.59 U3.60 2064.37,2455.63 U3.61@2070,2450 ; 2070,2310 2070,2246.06 U3.69 2109.57,2240.43 2130,2220 ; U3.66@2090,2320 2110,2320 2130,2340 ; 2100,2110 2110,2110 2130,2130 ; U3.88 U3.89 U3.90 2403.74,1876.26 U3.91@2410,1870
  Top Layer w20: 974.36,2209.68 1020,2255.32 1020,2328.74 ; U15.18@1001.72,773.98 1058.87,773.98 1064.4,779.5 1069.5,779.5 1080,790 1090,790 ; U1.29@1070,1910 1073.47,1906.53 U1.30 U1.31 U1.32 U1.33 U1.34 U1.35 1196.53,1906.53 U1.36@1200,1910 ; 1680.32,2209.68 1825,2065 ; 2208.07,1911.7 2208.07,1933.63 ; 2237.08,2822.92 2238.25,2824.08 2238.25,2857.95 2250,2869.7 2250,2890 2270,2910 ; U3.96@2540,1900 2544.05,1904.05 2544.05,1925.95 ; U3.96 U3.97 U3.98 2606.26,1876.26 ; U3.35 U3.34 U3.33 2591.93,2838.07 2580,2850 ; U3.15 2832.8,2317.2 v3(2860,2290) ; U3.29 2737.16,2677 2791.18,2677 2792.71,2675.47 2855.47,2675.47 X_A3.1@2860,2680 ; 2770,2037.41 2880,2037.41 X_A1.1 ; 2770,2395.68 2786.41,2395.68 2799.73,2409 2976,2409 2991.02,2393.98
  Top Layer w30: P4.9 160,1365 230,1295 270,1295 C1.2 270,970 220,920 220,789 C_B5.2 ; U14.1 288.62,3249.88 160.12,3249.88 P1.2 460,3550 535,3550 C3.2 542.5,3552.5 717.5,3552.5 C5.1 ; C4.1 380,2857.5 425,2902.5 C2.2 v3(660,2910) ; U2.4 505,2385 560,2440 v3(600,2440) 670,2440 OC1.1 ; v3(630,878.8) 651.2,878.8 690,840 U15.1@690,830 ; v3(690,2220) 720.82,2220 731.14,2209.68 ; OC6.1 710,2015 730,1995 735,1995 810,1920 v3(920,1950) 920,2052.2 920,2100 920.02,2091.53 920.06,2071.85 920.1,2052.16 920.1,2052.09 920.21,2032.41 920.32,2012.72 920.43,1993.04 920.54,1973.35 920.57,1972.71 U1.25@920.67,1970 ; U12.2 935,1600 1050,1715 OC8.2 v3(1150,1720) OC9.2 ; 950,2276.96 950,2327.79 950,2330 951.26,2328.74 1020,2328.74 v1(1098.74,2328.74) ; 1098.44,790 1170,790 1190,770 C_B1.2 v3(1310,770) ; 1270,1955.04 v3(1270,2000) ; U1.40 U1.41 U1.42 U1.43 U1.44 U1.45 U1.46 ; OC10.1 v3(1330,2720) ; U1.46@1400.63,1907.75 U1.48@1440,1907.75 ; U1.48 U1.49 U1.50 1479.37,1928.19 1524.65,1973.46 U1.51 1550,1973.46 1550,2022.52 ; R1.1 1490,3455 1490,3265 R3.1 ; v3(1495,3085) R3.1 ; X_C5.1 X_C5.1@1520,1135 ; X_C6.1@1620,835 X_C6.1 ; U8.4 1540,1115 X_C5.1@1520,1135 ; U9.4 1650,795 1620,825 X_C6.1 ; 1825,2065 1840,2065 1860,2045 OC11.1@1860,2040 ; v3(1880,3500) X_C3.1@1880,3585 ; X_C3.1 X_C3.1@1880,3585 ; U7.4 1768,3200 1740,3228 X_C4.1 1740,3238 1718,3260 R3.1 ; U6.4 1910,3555 X_C3.1@1880,3585 ; U3.52 2085.84,2675.47 2094.19,2683.82 2094.19,2696.44 2147.76,2750 ; 2094.37,2104.37 2094.37,2086.89 2094.37,2050 2187.63,2050 v3(2256.04,1981.59) ; 2094.37,2659.88 2094.37,2685.47 ; 2130,2130 2130,2214.8 ; 2130,2340 2130,2416.69 ; 2156.89,2733.11 2170,2720 2320,2720 2336.02,2736.02 ; 2208.07,1933.63 v3(2256.04,1981.59) ; X_A5.1@2228.07,1740 X_A5.1 X_A5.1@2220,1730 ; X_A5.1@2230,1730 X_A5.1@2220,1730 ; 2275.71,2914.5 2284.5,2914.5 2300,2930 X_A4.1 X_A4.1@2305,2950 ; 2336.02,1923.98 2278.4,1981.59 ; v3(2400,2885) 2400,2870 2343.74,2813.74 2340,2813.74 2340,2915 X_A4.1@2305,2950 ; v3(2430,610) X_C8.1 2450,690 2566.89,690 2571.89,685 U11.4@2597.48,685 ; 2544.05,1925.95 2488.4,1981.59 2278.4,1981.59 ; U5.4 2470,3055 2440,3085 X_A4.1@2305,2950 ; v3@2655,3690 X_C1.1@2750,3595 ; U10.4 2590,1435 2560,1465 X_C7.1 2410,1470 v3(2350,1530) C6.2 2220,1540 2220,1586.06 2080,1726.06 U13.2 X_A5.1@2220,1730 ; X_C1.1 X_C1.1@2750,3595 ; v3(2860,2290) 2860,2279.18 2880,2259.18 X_A1.1 ; X_A3.1@2875.47,2675.47 X_A3.1 v3(2880,2770) ; U4.4 2775,3570 X_C1.1@2750,3595 ; 2991.02,2393.98 3020,2365 X_A2.1 3050,2390 v3(3050,2460) ; X_C5.1@1520,1135 v3(1520,830) X_C6.1 ; v3(2256.04,1981.59) 2278.4,1981.59
  Bottom Layer w30: v3(690,2220) OC3.2@790,2220 ; OC7.1 850,2020 v3@912.35,1957.65 ; v3(920,1950) 950,1920 OC5.1@1025,1995 ; OC5.1@1050,2015 OC5.1 OC4.1 1250,2020 v3(1270,2000) ; v1(1098.74,2328.74) OC2.2@1098.74,2408.74
  other v3: 1720,2110 2580,2870 2650,3700
NetC_B2_1: C_B2.1 U15.4 | length 318.8
  Top Layer w8: C_B2.1 459,851 561.61,748.39 U15.4@716.28,748.39
NetC_B2_2: C_B2.2 U15.2 | length 326.7
  Top Layer w8: C_B2.2 459,955 614.43,799.57 U15.2@716.28,799.57
NetC_B3_1: C_B3.1 U15.3 | length 460
  Top Layer w8: C_B3.1 299,865 354,810 v2(379,810) ; v2(585.02,773.98) U15.3@706.28,773.98
  Bottom Layer w8: v2(379,810) 559,810 v2@595.02,773.98
NetC_B4_1: C_B4.1 U15.6 | length 289.3
  Top Layer w8: C_B4.1 559,620 636.2,697.2 U15.6@716.28,697.2
NetC_B4_2: C_B4.2 U15.5 | length 262.6
  Top Layer w8: C_B4.2 471.8,722.8 U15.5@716.28,722.8
NetC_B5_1: C_B5.1 U15.7 | length 507.9
  Top Layer w8: C_B5.1 299,615 320,594 325,594 379,540 529,540 660.61,671.61 U15.7@716.28,671.61
NetD1_2: D1.2 R1.2 | length 245
  Top Layer w8: D1.2@1140,3460 R1.2@1385,3460
NetD2_2: D2.2 R3.2 | length 252.1
  Top Layer w8: D2.2 1400,3255 R3.2
NetR5_1: R5.1 U2.5 | length 595.3
  Top Layer w8: U2.5 552.52,2542.52 834,2824 834,2939 855,2960 R5.1
NetR6_1: R6.1 U2.3 | length 575.4
  Top Layer w8: U2.3 455,2385 620.35,2550.35 675.35,2550.35 855,2730 R6.1
RS422_A0: P2.1 U4.8 | length 912
  Top Layer w8: U4.8@3140,3720 3510,3350 3510,3230 P2.1
RS422_A1: P2.10 U5.8 | length 1369.2
  Top Layer w8: U5.8 v1(2910,3205)
  Bottom Layer w8: v1(2910,3205) 2910,2970 3190,2690 3750,2690 P2.10
RS422_A2: P2.11 U6.8 | length 2184.4
  Top Layer w8: U6.8 2325,3705 2570,3460 3160,3460 3330,3290 3330,2890 3680,2540 P2.11
RS422_A3: P2.17 U7.8 | length 2315.1
  Top Layer w8: U7.8 2200,3350 2210,3340 3070,3340 3170,3240 3170,2770 P2.17
RS422_A4: P2.21 U8.8 | length 2478.3
  Top Layer w8: U8.8 3155,1265 3200,1310 3200,1890 3350,2040 P2.21
RS422_A5: P2.27 U9.8 | length 2297
  Top Layer w8: U9.8 2085,945 2220,1080 3210,1080 3400,1270 3400,1680 3460,1740 P2.27
RS422_A6: P2.31 U10.8 | length 796.1
  Top Layer w8: U10.8 v1(3065,1585)
  Bottom Layer w8: v1(3065,1585) 3110,1540 P2.31
RS422_A7: P2.37 U11.8 | length 1085.2
  Top Layer w8: U11.8@2782.52,835 3205,835 3610,1240 P2.37
RS422_B0: P2.2 U4.7 | length 1255.8
  Top Layer w8: U4.7 3060,3670 3040,3690 3040,3740 3070,3770 3160,3770 3800,3130 P2.2
RS422_B1: P2.9 U5.7 | length 1253.3
  Top Layer w8: U5.7 v1(2870,3155) ; P2.9@3680,2640 3690,2650 P2.9
  Bottom Layer w8: v1(2870,3155) 2870,2960 3190,2640 P2.9
RS422_B2: P2.12 U6.7 | length 2270.7
  Top Layer w8: U6.7 2325,3655 2550,3430 3140,3430 3290,3280 3290,2880 v1(3580,2590) v1@3585,2585
  Bottom Layer w8: v1(3580,2590) 3750,2590 P2.12
RS422_B3: P2.18 U7.7 | length 2411.5
  Top Layer w8: U7.7 2200,3300 2210,3310 3050,3310 3130,3230 3130,2740 v1@3585,2285
  Bottom Layer w8: v1(3590,2290) 3750,2290 P2.18
RS422_B4: P2.22 U8.7 | length 2593.1
  Top Layer w8: U8.7 3165,1215 3250,1300 3250,1870 3370,1990 3750,1990 P2.22
RS422_B5: P2.28 U9.7 | length 2400.1
  Top Layer w8: U9.7 2095,895 2240,1040 3230,1040 3450,1260 3450,1640 3505,1695 3755,1695 P2.28
RS422_B6: P2.32 U10.7 | length 916.8
  Top Layer w8: U10.7 v1(3065,1535)
  Bottom Layer w8: v1(3065,1535) 3110,1490 3750,1490 P2.32
RS422_B7: P2.38 U11.7 | length 1205.9
  Top Layer w8: U11.7@2782.52,785 3245,785 3650,1190 3750,1190 P2.38
RS422_Y0: P2.3 U4.5 | length 1020.8
  Top Layer w8: U4.5 3380,3300 3380,3010 3450,2940 P2.3
RS422_Y1: P2.7 U5.5 | length 1077.7
  Top Layer w8: U5.5 v1(2960,3055)
  Bottom Layer w8: v1(2960,3055) 2960,2970 3190,2740 P2.7
RS422_Y2: P2.13 U6.5 | length 2169.5
  Top Layer w8: U6.5 2335,3555 2520,3370 3100,3370 3210,3260 3210,2850 3620,2440 P2.13
RS422_Y3: P2.19 U7.5 | length 2347.5
  Top Layer w8: U7.5 2210,3200 2260,3250 2990,3250 3050,3190 3050,2700 3610,2140 P2.19
RS422_Y4: P2.23 U8.5 | length 2493.1
  Top Layer w8: U8.5 3185,1115 3350,1280 3350,1850 3440,1940 P2.23
RS422_Y5: P2.29 U9.5 | length 2288.4
  Top Layer w8: U9.5 2115,795 2280,960 3270,960 3550,1240 3550,1600 3590,1640 P2.29
RS422_Y6: P2.33 U10.5 | length 779.6
  Top Layer w8: U10.5 2927.52,1440 v1(3120,1440)
  Bottom Layer w8: v1(3120,1440) P2.33
RS422_Y7: P2.39 U11.5 | length 1105.9
  Top Layer w8: U11.5@2782.52,685 3245,685 P2.39
RS422_Z0: P2.4 U4.6 | length 1105.7
  Top Layer w8: U4.6@3140,3620 3420,3340 3420,3060 3490,2990 3750,2990 P2.4
RS422_Z1: P2.8 U5.6 | length 1219
  Top Layer w8: U5.6 v1(3005,3105)
  Bottom Layer w8: v1(3005,3105) 3005,2985 3200,2790 3750,2790 P2.8
RS422_Z2: P2.14 U6.6 | length 2284.4
  Top Layer w8: U6.6 2325,3605 2530,3400 3120,3400 3250,3270 3250,2870 3630,2490 3750,2490 P2.14
RS422_Z3: P2.20 U7.6 | length 2451.7
  Top Layer w8: U7.6 2200,3250 2230,3280 3020,3280 3090,3210 3090,2720 3620,2190 3750,2190 P2.20
RS422_Z4: P2.24 U8.6 | length 2572.4
  Top Layer w8: U8.6 3175,1165 3300,1290 v1(3300,1860)
  Bottom Layer w8: v1(3300,1860) 3336.74,1896.74 3756.74,1896.74 P2.24
RS422_Z5: P2.30 U9.6 | length 2355.9
  Top Layer w8: U9.6 2105,845 2260,1000 3250,1000 3500,1250 v1(3500,1590)
  Bottom Layer w8: v1(3500,1590) 3750,1590 P2.30
RS422_Z6: P2.34 U10.6 | length 937.5
  Top Layer w8: U10.6 v1(3025,1485)
  Bottom Layer w8: v1(3025,1485) 3120,1390 3750,1390 P2.34
RS422_Z7: P2.40 U11.6 | length 1466.6
  Top Layer w8: U11.6@2782.52,735 2735,735 2700,700 2700,650 2720,630 3290,630 P2.40
RUNNING: D2.1 U1.98 | length 742.7
  Top Layer w8: D2.1 1046.3,3253.7 U1.98
RX0: U3.31 U4.2 | length 1066.2
  Top Layer w8: U3.31 2643.11,2813.11 2740,2910 v1(2810,2910) ; v1(2870,3670) U4.2
  Bottom Layer w8: v1(2810,2910) 2810,3140 2870,3200 v1@2870,3660
RX1: U3.39 U5.2 | length 482
  Top Layer w8: U3.39 2438.39,2858.39 v1(2460,2880) ; v1(2555,3155) U5.2
  Bottom Layer w8: v1(2460,2880) 2555,2975 v1(2555,3155)
RX2: U3.49 U6.2 | length 1096.3
  Top Layer w8: v1(1950,2950) 2050,2950 2050,2943.49 2174.78,2818.71 2174.78,2815.22 U3.49@2180,2810 ; v1(1950,3655) U6.2
  Bottom Layer w8: v1(1950,2950) v1(1950,3655)
RX3: U3.57 U7.2 | length 1022.5
  Top Layer w8: v1(1820,3020) 1930,2910 1930,2590 1972.48,2547.52 U3.57 ; v1(1820,3300) U7.2
  Bottom Layer w8: v1(1820,3020) v1(1820,3300)
RX4: U3.65 U8.2 | length 1424.2
  Top Layer w8: v1(1625,1215) U8.2 ; v1(1870,1910) 1920,1960 1920,2270 1992.8,2342.8 U3.65
  Bottom Layer w8: v1(1625,1215) 1625,1625 1870,1870 v1(1870,1910)
RX5: U3.73 U9.2 | length 1493.2
  Top Layer w8: v1(1715,895) U9.2 ; v1(1970,1920) 1970,2100 2008.07,2138.07 U3.73
  Bottom Layer w8: v1(1715,895) 1715,1635 1970,1890 v1(1970,1920)
RX6: U3.92 U10.2 | length 501.7
  Top Layer w8: U3.92 2438.39,1811.61 v1(2460,1790) ; v1(2675,1535) U10.2
  Bottom Layer w8: v1(2460,1790) 2675,1575 v1(2675,1535)
RX7: U3.100 U11.2 | length 1287.1
  Top Layer w8: v1(2535,785) U11.2@2597.48,785 ; U3.100 2643.11,1826.89 v1(2675,1795)
  Bottom Layer w8: v1(2535,785) 2535,1035 2750,1250 2750,1720 v1(2675,1795)
TCK: P4.4 R7.1 U1.2 | length 1061.3
  Top Layer w8: R7.1 530,2215 601.75,2286.75 606.75,2286.75 v1(610,2290) ; v1(800,2480) 850,2480 903.78,2426.22 U1.2
  Bottom Layer w8: P4.4 310,1950 610,2250 v1(610,2290) v1(800,2480)
TDI: P4.7 U1.3 | length 1132.4
  Top Layer w8: v1(830,2440) 860,2440 893.47,2406.53 U1.3
  Bottom Layer w8: P4.7 210,1800 280,1800 640,2160 640,2250 v1(830,2440)
TDO: P4.6 U1.4 | length 973.2
  Top Layer w8: P4.6 v1(370,1850) ; v1(830,2400) 870,2400 883.15,2386.85 U1.4
  Bottom Layer w8: v1(370,1850) 670,2150 670,2199.7 661.5,2208.2 661.5,2231.8 829.7,2400 v1(830,2400)
TMS: P4.5 U1.1 | length 1363.6
  Top Layer w8: v1(770,2520) 850,2520 U1.1@921.22,2448.78 ; U1.1@918.35,2445.9 U1.1
  Bottom Layer w8: P4.5 70,1940 70,2100 150,2180 430,2180 v1(770,2520)
TX0: U3.38 U4.3 | length 1068.7
  Top Layer w8: U3.38 2463.98,2833.98 v1(2510,2880) ; v1(2830,3620) U4.3
  Bottom Layer w8: v1(2510,2880) 2820,3190 2820,3610
TX1: U3.46 U5.3 | length 529.7
  Top Layer w8: U3.46 2259.25,2849.25 v1(2290,2880) ; v1(2515,3105) U5.3
  Bottom Layer w8: v1(2290,2880) v1(2515,3105)
TX2: U3.56 U6.3 | length 1155.1
  Top Layer w8: v1(1990,2900) 1990,2600 2016.89,2573.11 U3.56 ; v1(1990,3605) U6.3 U6.3@2042.48,3610
  Bottom Layer w8: v1(1990,2900) v1(1990,3605)
TX3: U3.64 U7.3 | length 1089.7
  Top Layer w8: v1(1860,2910) 1860,2490 1981.61,2368.39 ; v1(1860,3250) U7.3
  Top Layer w10: 1981.61,2368.39 U3.64
  Bottom Layer w8: v1(1860,2910) v1(1860,3250)
TX4: U3.72 U8.3 | length 1378
  Top Layer w8: v1(1595,1165) U8.3 ; v1(1820,1870) 1870,1870 1950,1950 1950,2140 1973.66,2163.66 U3.72
  Bottom Layer w8: v1(1595,1165) 1595,1645 v1(1820,1870)
TX5: U3.80 U9.3 | length 1416
  Top Layer w8: v1(1680,850) 1782.48,850 U9.3 ; v1(1910,1870) 1960,1870 2048.94,1958.94 U3.80
  Bottom Layer w8: v1(1680,850) 1680,1640 v1(1910,1870)
TX6: U3.85 U10.3 | length 678.7
  Top Layer w8: U3.85 2259.25,1840.75 2290,1810 v1(2300,1810) ; v1(2645,1485) U10.3
  Bottom Layer w8: v1(2300,1810) 2300,1780 2435.87,1644.13 2485.87,1644.13 v1(2645,1485)
TX7: U3.93 U11.3 | length 1479.1
  Top Layer w8: U3.93 2463.98,1836.02 2510,1790 v1(2610,1790) ; v1(2505,735) U11.3@2597.48,735
  Bottom Layer w8: v1(2505,735) 2505,1055 2710,1260 2710,1690 v1(2610,1790)
UART0_RXD_I: J1.2 U15.9 | length 551.9
  Top Layer w8: U15.9@692.59,620.43 716.28,620.43 889.57,620.43 987.13,522.87 J1.2
UART0_TXD_O: J1.3 U15.8 | length 488.7
  Top Layer w8: U15.8@716.28,646.02 666.02,646.02 653.31,633.31 653.31,530.66 J1.3
UART1_RXD_I: J2.2 U15.16 | length 2198.9
  Top Layer w8: U15.16@991.72,722.8 992.42,723.5 1116,723.5 1129.5,710 v2(1140,710) ; v1(2710,460) 2900,460 2950,410 2950,308.78 J2.2
  Bottom Layer w8: v2@1139,720 1399,460 v1(2710,460)
UART1_TXD_O: J2.3 U15.17 | length 2094.4
  Top Layer w8: U15.17@991.72,748.39 993.33,750 v1(1100,750) ; J2.3 J2.3@2839.03,306.87
  Bottom Layer w8: v1(1100,750) 1160,750 1410,500 2750,500 2838.07,411.93 J2.3
VO0: R6.2 U1.100 | length 243.7
  Top Layer w8: R6.2 955,2730 1006.93,2678.07 U1.100
VO1: R5.2 U1.99 | length 481.8
  Top Layer w8: R5.2 955,2960 1026.61,2888.39 U1.99
VOUT0: P3.1 U2.1 U2.2 | length 256.5
  Top Layer w8: P3.1 176.31,2327.48 U2.2@405,2327.48
  other v5: 200,2380
VOUT1: P3.3 U2.6 U2.7 | length 355.4
  Top Layer w8: P3.3 220,2490 360,2490 U2.7@412.52,2512.52 ; U2.7 U2.7@412.52,2512.52 ; U2.6@455,2512.52 U2.7@412.52,2512.52
pads on no net: J1.1 J1.4 J1.6 J1.7 J1.8 J1.9 J1.10 J1.11 J2.1 J2.4 J2.6 J2.7 J2.8 J2.9 J2.10 J2.11 P4.8 P4.10 U1.27 U1.82 U1.83 U1.84 U1.85 U1.86 U1.87 U1.88 U1.93 U1.94 U1.95 U1.96 U1.97 U3.36 U3.37 U3.44 U3.45 U3.54 U3.55 U3.62 U3.63 U3.70 U3.71 U3.78 U3.79 U3.81 U3.86 U3.87 U3.94 U3.95 U12.1 U13.1 U15.11
copper on no net:
  other v4: 190,190 3740,190 210,3740 3750,3740

## Polygon pours and split planes (outlines as drawn)
no net on Bottom Layer " Layer-No Net1" (hatched 45Degree grid 20 track 8, pour order 4): 6.1,-5 6.1,3932.01 3943.11,3932.01 3943.11,-5
no net on Top Layer "NONET_L01_P002" (hatched 45Degree grid 20 track 8, pour order 2): 30,3910 30,20 3920,20 3910,30 3910,3900
GND on GND (split plane): 3923.01,15.1 26.2,15.1 26.2,3911.91 3923.01,3911.91
+3.3V on POWER (split plane): 3923.01,15.1 26.2,15.1 26.2,3911.91 3923.01,3911.91
+5V on POWER (split plane): 375.92,3148.31 375.92,2484.08 234.08,2484.08 234.08,2980 233.77,2981.56 232.88,2982.88 202.88,3012.88 201.56,3013.77 200,3014.08 111.69,3014.08 94.08,3031.69 94.08,3178.31 111.69,3195.92 328.31,3195.92

## Keep-outs
Keep-Out Layer:
  the board outline again, w5

## Other copper
POWER (plane layer: these items are gaps in the copper):
  lines w8: 90,3030 90,3180 110,3200 330,3200 380,3150 380,2480 300,2480 230,2480 230,2980 200,3010 110,3010 90,3030

## Silkscreen, mask and mechanical layers (free items; w line width, h text height)
Top Overlay:
  text "031810516XCC" at 780,3770 h60
Bottom Overlay:
  lines w10: -10,0 0,10 0,3950 3910,3950 3940,3920 3940,10 3930,0 -10,0

## Text inside footprints (layer, text, board x,y; h text height)
J1: Top Overlay "1" at 1090,380 h59.06; Top Overlay "5" at 640,380 h59.06; Top Overlay "9" at 700,30 h59.06; Top Overlay "6" at 1020,30 h59.06
J2: Top Overlay "1" at 3050,390 h59.06; Top Overlay "5" at 2600,390 h59.06; Top Overlay "9" at 2660,20 h59.06; Top Overlay "6" at 2980,20 h59.06
P2: Top Overlay "1" at 3680,3140 h50 r270; Top Overlay "2" at 3780,3140 h50 r270; Top Overlay "40" at 3780,1060 h50 r270; Top Overlay "39" at 3680,1060 h50 r270
P4: Top Overlay "10" at 240,1590 h50 r270; Top Overlay "9" at 140,1590 h50 r270; Top Overlay "1" at 140,2130 h50 r270; Top Overlay "2" at 240,2150 h50 r270